# Altium PCB Shutdown_pcb.PcbDoc
Units mm, origin at the board's own origin, x right, y up, seen from the top; angles counter-clockwise.
Board outline 70 x 60.02 mm, 2 copper layers (Top Layer, Bottom Layer); 21 components, 20 nets, 84 pads, 0 vias.
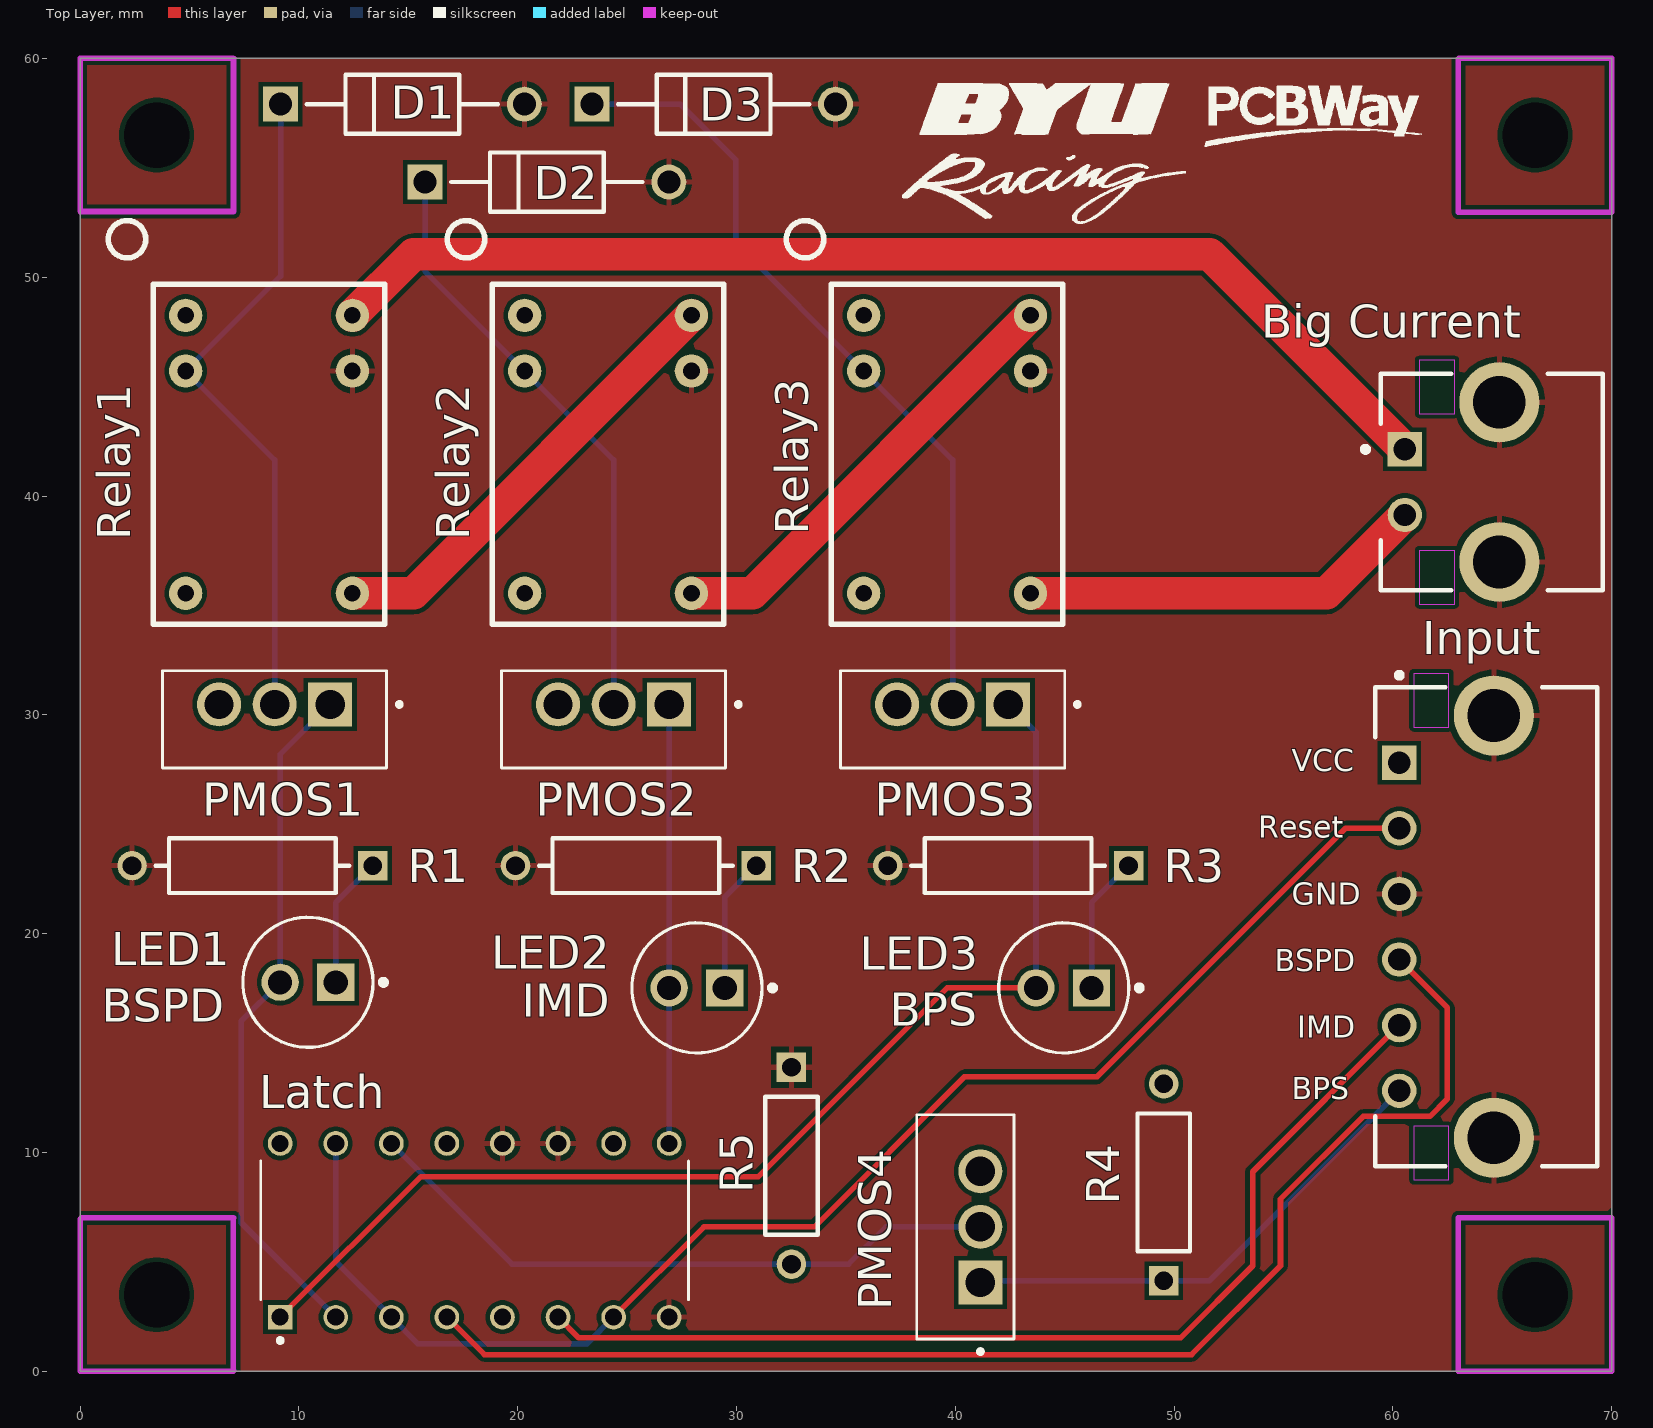
[diagram p0: Top Layer view]
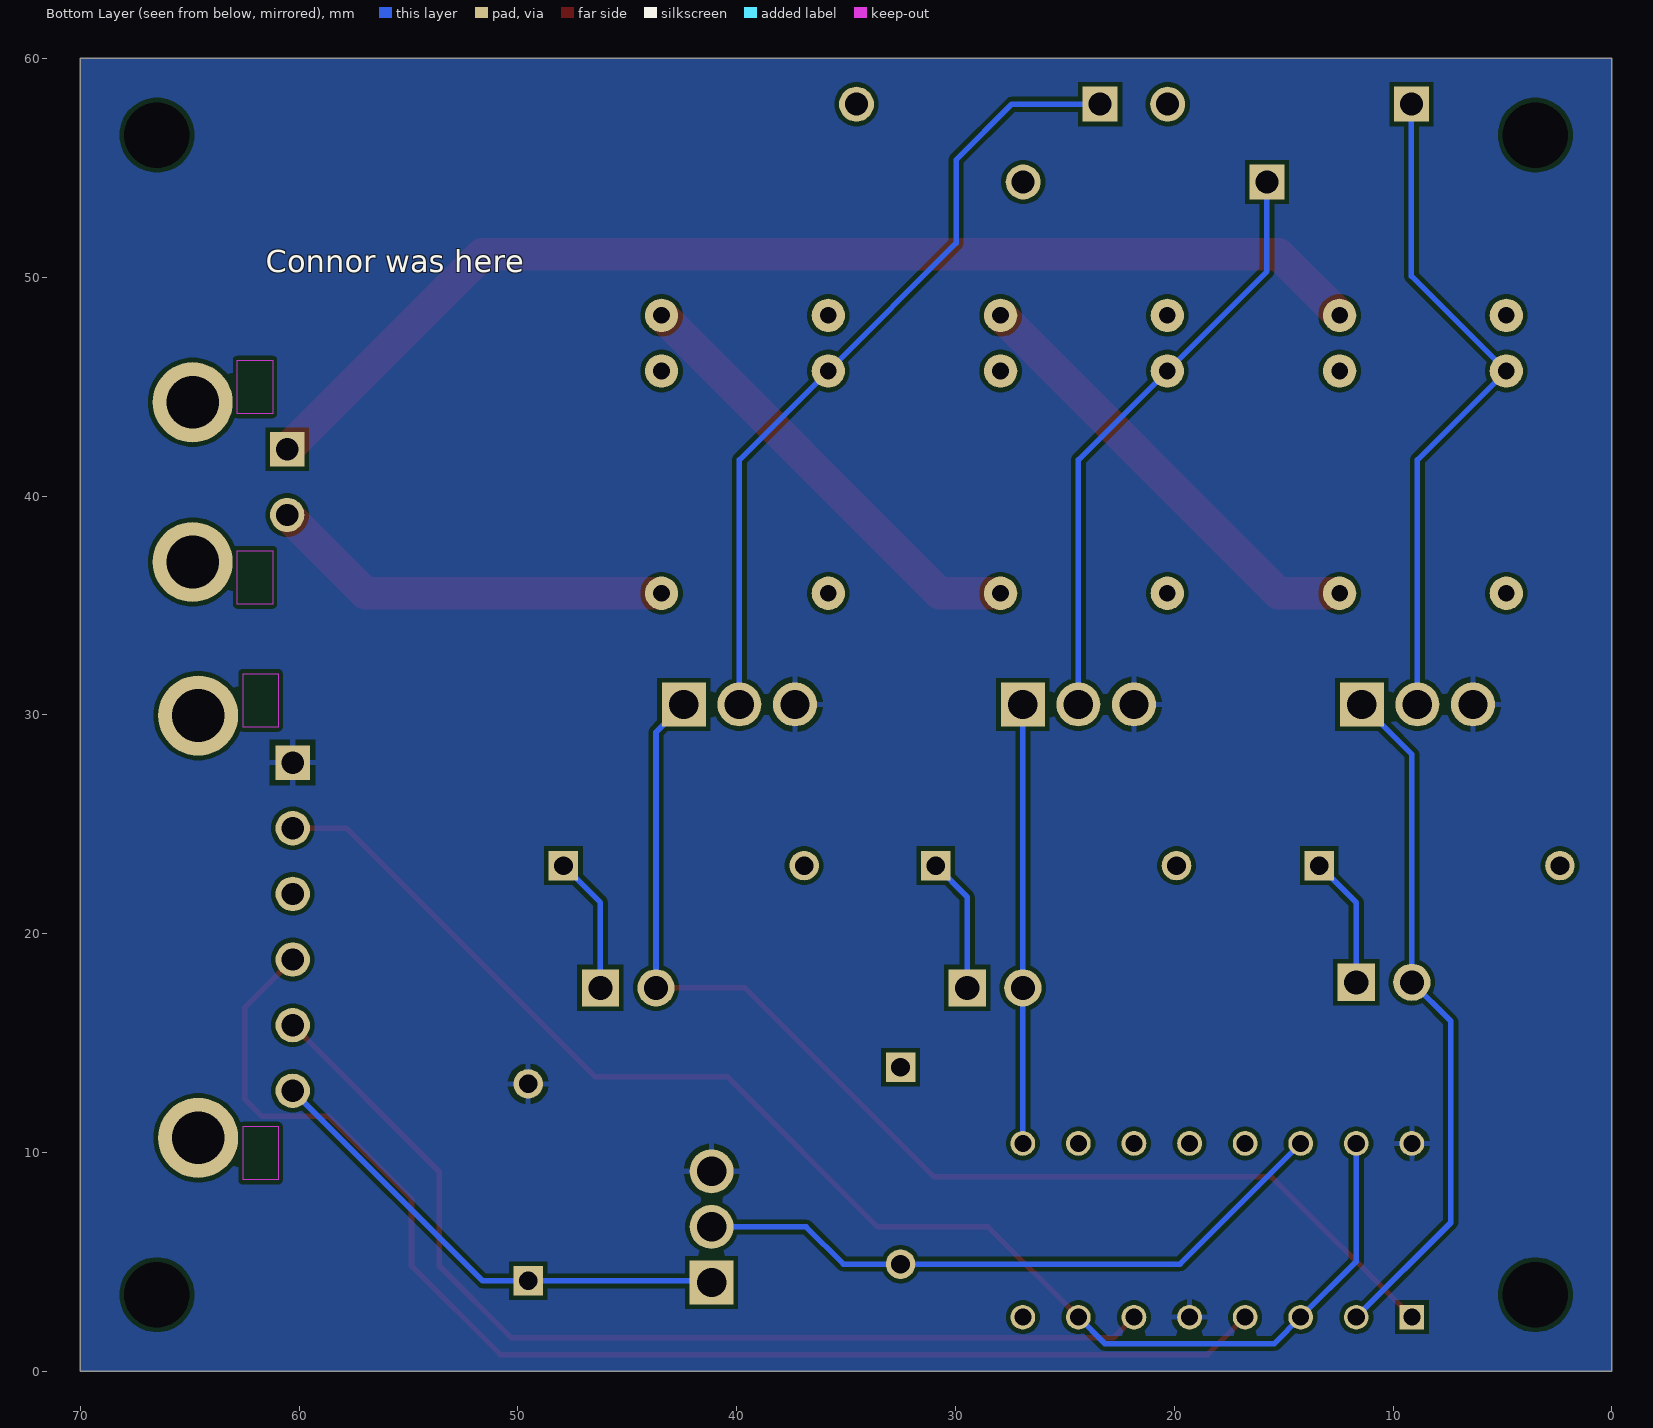
[diagram p1: Bottom Layer view, seen from below]
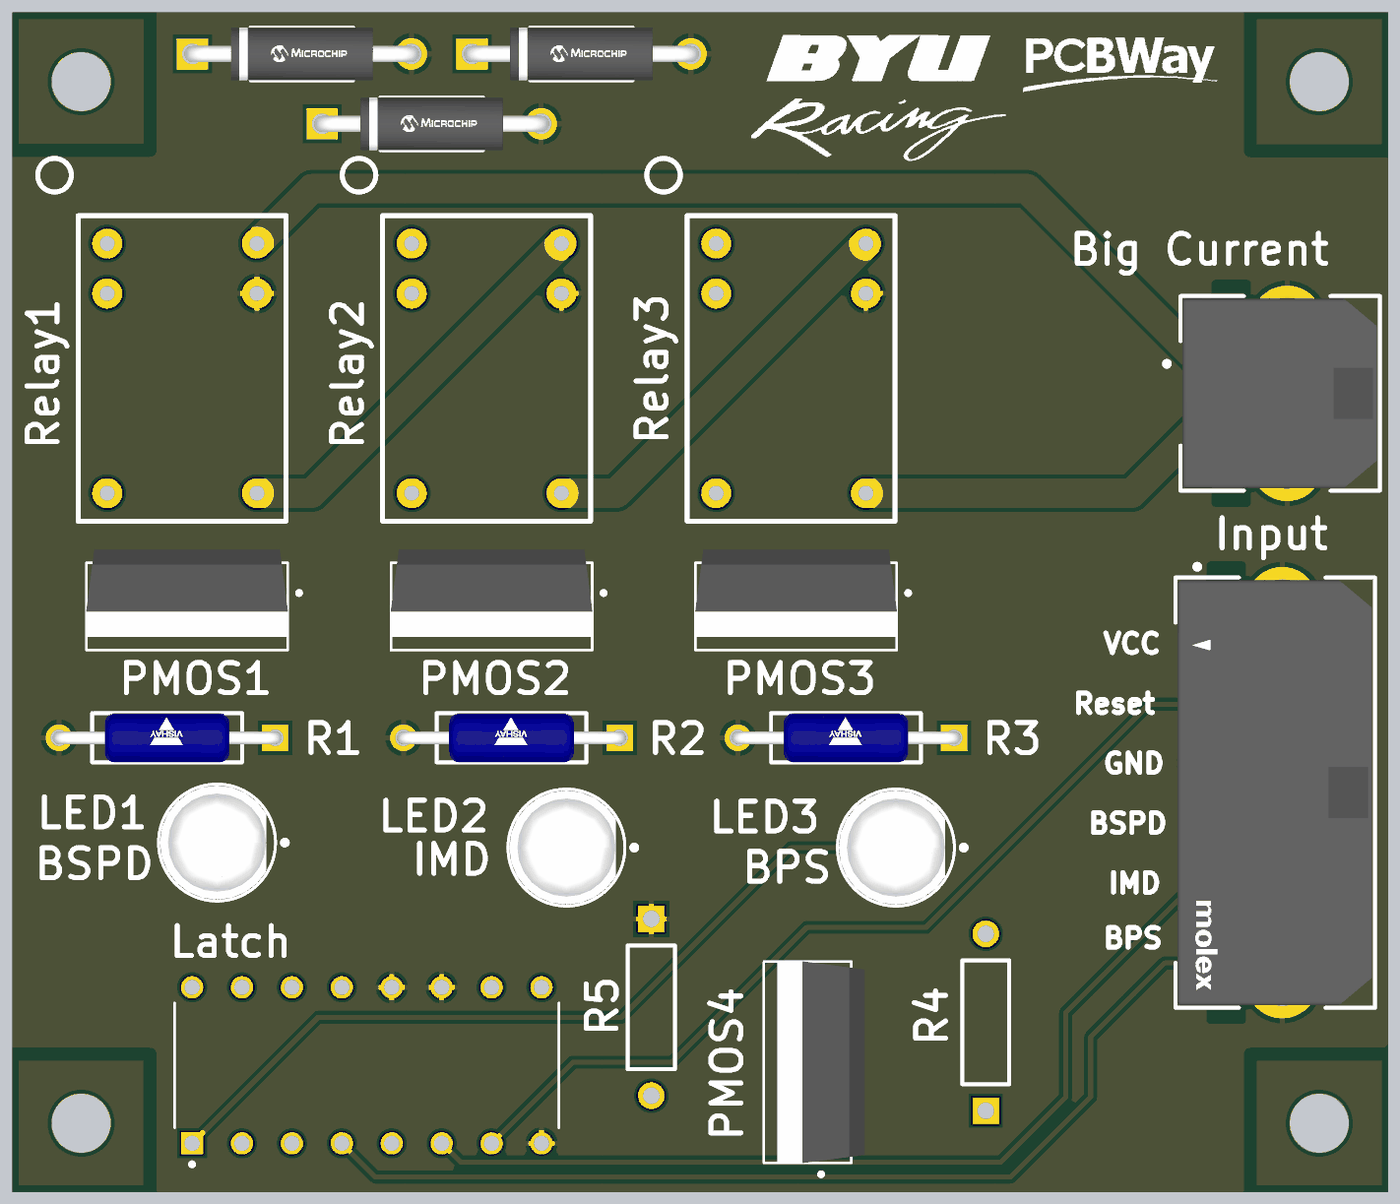
[diagram p2: 3D render of the assembled board from above, using the file's embedded part models]

## Layer stack, top to bottom
Top Solder: solder mask 0.0102, Solder Resist, Dk 3.5
Top Layer: signal copper 0.0356
Dielectric 1: dielectric 0.32, FR-4, Dk 4.8
Bottom Layer: signal copper 0.0356
Bottom Solder: solder mask 0.0102, Solder Resist, Dk 3.5

## Board outline
0,0 70.002,0 70.002,60.02 0,60.02

## Design rules (kind name [scope] priority, off if disabled: settings)
Clearance [All] p1: gap=0.2 ignorepadtopadclearanceinfootprint=FALSE
ComponentClearance [All] p1: gap=0.254 collisioncheckmode=3 verticalgap=0.2 showdistances=FALSE
HoleSize [All] p1: absolutevalues=TRUE maxlimit=5 minlimit=0.025 maxpercent=80.000 minpercent=20.000
HoleToHoleClearance [All] p1: gap=0.1 allowstackedmicrovias=TRUE
MinimumSolderMaskSliver [All] p1: minsoldermaskwidth=0.1
PolygonConnect [All] p1: connectstyle=Relief reliefconductorwidth=0.254 reliefentries=4 polygonreliefangle="90 Angle" airgapwidth=0.254
RoutingVias [All] p1: holewidth=0.711 width=1.27 viastyle="Through Hole" minholewidth=0.711 minwidth=1.27 maxholewidth=0.711 maxwidth=1.27
SilkToSilkClearance [All] p1: silktosilkclearance=0.15
SilkToSolderMaskClearance [IsPad] p1: minsilkscreentomaskgap=0.1 clearancetoexposedcopper=TRUE
SolderMaskExpansion [All] p1: expansion=0.102 istentingtop=FALSE
SupplyNets "Schematic Supply Nets_1" [InNet('GND')] p1: voltage=0.000
SupplyNets "Schematic Supply Nets" [InNet('VCC')] p2: voltage=0.000
Width [All] p1: maxlimit=2 minlimit=0.254 preferedwidth=0.254 minimp=50.000000 maximp=50.000000 favimp=50.000000
24 further rules are at their usual default settings.

## Components (designator, comment, footprint, x,y, rotation, side; value= is the part's Value field where it differs from the comment)
"Big Current" "43650-0205" FP-43650-0205-MFG 64.516,40.64 r90 top
D1 "1N4004-TP" FP-DO-41-MFG 14.732,57.912 r0 top
D2 "1N4004-TP" FP-DO-41-MFG 21.336,54.356 r0 top
D3 "1N4004-TP" FP-DO-41-MFG 28.956,57.912 r0 top
Input "43650-0603" FP-43650-0603-MFG 64.262,20.32 r90 top
Latch "CD4043BE" DIP794W45P254L1969H508Q16 18.034,6.444 r90 top
LED1 "TSFF5210" FP-6_544-5258_09-4-MFG 10.414,17.78 r180 top
LED2 "TSFF5210" FP-6_544-5258_09-4-MFG 28.194,17.526 r180 top
LED3 "TSFF5210" FP-6_544-5258_09-4-MFG 44.958,17.526 r180 top
PMOS1 "IRF9640PBF" TO254P1052X465X1989-3 8.89,30.48 r180 top
PMOS2 "IRF9640PBF" TO254P1052X465X1989-3 24.384,30.48 r180 top
PMOS3 "IRF9640PBF" TO254P1052X465X1989-3 39.878,30.48 r180 top
PMOS4 "IRF9640PBF" TO254P1052X465X1989-3 41.148,6.604 r90 top
R1 "RLR07C15R0FSB14" FP-RLR07-MFG 7.874,23.114 r180 top
R2 "RLR07C15R0FSB14" FP-RLR07-MFG 25.4,23.114 r180 top
R3 "RLR07C15R0FSB14" FP-RLR07-MFG 42.418,23.114 r180 top
R4 "MFR-25FBF5210K" RESA60-630X240 49.53,8.636 r90 top
R5 "MFR-25FBF5210K" RESA60-630X240 32.512,9.398 r270 top
Relay1 "J1021CS512VDC.45" J1021CS512VDC.45-Footprint-2 3.346,34.14 r0 top
Relay2 "J1021CS512VDC.45" J1021CS512VDC.45-Footprint-2 18.84,34.14 r0 top
Relay3 "J1021CS512VDC.45" J1021CS512VDC.45-Footprint-2 34.334,34.14 r0 top

## Footprints (in the part's own frame and the unit in brackets; to place one, negate y for a bottom-side part, rotate by r counter-clockwise, add the part's x,y. Pads: shape width x height; smd on the part's side, far side on the other; paste and mask are expansions set on the pad)
DIP794W45P254L1969H508Q16 [mm]
  rect 1.13x1.13 hole 0.78: 1(-3.97,8.89)
  round 1.13 hole 0.78: 2(-3.97,6.35) 3(-3.97,3.81) 4(-3.97,1.27) 5(-3.97,-1.27) 6(-3.97,-3.81) 7(-3.97,-6.35) 8(-3.97,-8.89) 9(3.97,-8.89) 10(3.97,-6.35) 11(3.97,-3.81) 12(3.97,-1.27) 13(3.97,1.27) 14(3.97,3.81) 15(3.97,6.35) 16(3.97,8.89)
  silkscreen extent -5.13,-9.77 3.18,9.77
FP-6_544-5258_09-4-MFG [mm]
  rect 1.7x1.7 hole 1.1 paste-2539.97 mask+0: 1(-1.27,0)
  round 1.7 hole 1.1 paste-2539.97 mask+0: 2(1.27,0)
  silkscreen extent -3.58,-2.97 2.97,2.97, body extent -3.08,-3.08 3.08,3.08, height 0.25
FP-43650-0205-MFG [mm]
  rect 1.57x1.57 hole 1.02 paste-2539.97 mask+0: 1(1.5,3.97)
  round 1.57 hole 1.02 paste-2539.97 mask+0: 2(-1.5,3.97)
  round 3.66 hole 2.41 paste-2539.97 mask+0: 3(-3.65,-0.35) 4(3.65,-0.35)
  Keep-Out Layer region: -5.575,1.7 -3.125,1.7 -3.125,3.3 -5.575,3.3
  Keep-Out Layer region: 3.125,1.7 5.575,1.7 5.575,3.3 3.125,3.3
  silkscreen extent -4.95,-5.07 4.95,5.89, body extent -5.58,-5.18 5.58,5.18, height 0.25
FP-43650-0603-MFG [mm]
  rect 1.57x1.57 hole 1.02 paste-2539.97 mask+0: 1(7.5,3.97)
  round 1.57 hole 1.02 paste-2539.97 mask+0: 2(4.5,3.97) 3(1.5,3.97) 4(-1.5,3.97) 5(-4.5,3.97) 6(-7.5,3.97)
  round 3.66 hole 2.41 paste-2539.97 mask+0: 7(-9.65,-0.35) 8(9.65,-0.35)
  Keep-Out Layer region: 9.12,1.7 11.57,1.7 11.57,3.3 9.12,3.3
  Keep-Out Layer region: -11.57,1.7 -9.12,1.7 -9.12,3.3 -11.57,3.3
  silkscreen extent -10.94,-5.07 11.62,5.07, body extent -11.58,-5.18 11.58,5.18, height 0.25
FP-DO-41-MFG [mm]
  rect 1.6x1.6 hole 1.05 paste-2539.97 mask+0: 1(-5.57,0)
  round 1.6 hole 1.05 paste-2539.97 mask+0: 2(5.57,0)
  silkscreen extent -4.37,-1.35 4.37,1.35, body extent -6.47,-1.45 6.47,1.45, height 0.25
FP-RLR07-MFG [mm]
  rect 1.35x1.35 hole 0.85 paste-2539.97 mask+0: 1(-5.5,0)
  round 1.35 hole 0.85 paste-2539.97 mask+0: 2(5.5,0)
  silkscreen extent -4.42,-1.25 4.42,1.25, body extent -6.27,-1.35 6.27,1.35, height 0.25
J1021CS512VDC.45-Footprint-2 [mil]
  round 60 hole 30: 1(58.27,555.91) 2(58.27,455.91) 3(58.27,55.91) 4(358.27,55.91) 5(358.27,455.91) 6(358.27,555.91)
  silkscreen extent -81,0 417,727
RESA60-630X240 [mm] "Axial Resistor, 2-Leads, Dia 2.4mm, Body Length 6.3mm"
  rect 1.35x1.35 hole 0.85: 1(-4.5,0)
  round 1.35 hole 0.85: 2(4.5,0)
  silkscreen extent -3.15,-1.2 3.15,1.2, body extent -3.15,-1.2 3.15,1.2, height 2.4
TO254P1052X465X1989-3 [mm]
  rect 2.01x2.01 hole 1.34: 1(-2.54,0)
  round 2.01 hole 1.34: 2(0,0) 3(2.54,0)
  silkscreen extent -5.8,-1.54 5.12,2.91, body extent -5.14,-2.22 5.14,2.23, height 19.06

## Part data
"Big Current": library part CMP-00257-07672643-1, "43650-0205 Conn Wire to Board HDR 2 POS 3mm Solder RA Side Entry Thru-Hole Micro-Fit 3.0™ Tray", Current Rating=5A, Manufacturer Lifecycle Status=ACTIVE, Voltage Rating=600V, Contact Material=Brass, Contact Plating=Gold, Country of Origin=US, Gender=Male, Glow Wire Compliant=Compliant, Halogen Free="Low Halogen", Housing Material=Thermoplastic, Lifecycle Status=Production, NexarPartId=7672643, Number of Circuits=2, Number of Contacts=2, Number of Positions=2, Number of Rows=1, Orientation="Right Angle", Pitch=3mm, Plating=Tin, RoHS=Compliant, Termination="Through Hole"
D1 D2 D3: library part CMP-56207-000012-1, "DIODE GEN PURP 400V 1A DO41", Average Rectified Current=1A, Capacitance=15pF, Case/Package=DO-41, Forward Voltage=1V, Max Forward Surge Current (Ifsm)=30A, Max Operating Temperature=150°C, Max Repetitive Reverse Voltage (Vrrm)=400V, Max Reverse Current=5uA, Min Operating Temperature=-55°C, Package Quantity=1, Current Rating=1A, Diameter=2.7mm, Element Configuration=Single, Forward Current=1A, Lead Free="Lead Free", Length=5.2mm, Max Reverse Voltage (DC)=400V, Max Surge Current=30A, Mount="Through Hole", Number of Pins=2, Output Current=1A, Packaging="Tape and Reel", Peak Non-Repetitive Surge Current=30A, Polarity=Standard, Radiation Hardening=No, Recovery Time=2000ns, Reverse Recovery Time=2us, Reverse Voltage=400V, RoHS Compliant=Yes, Voltage Rating (DC)=400V
Input: library part CMP-00257-00298086-1, "43650-0603 Conn Power HDR 6 POS 3mm Solder RA Thru-Hole 6 Terminal 1 Port Micro-Fit 3.0™ Frame", Color=Black, Current Rating=5A, Flammability Rating="UL94 V-0", Manufacturer Lifecycle Status=ACTIVE, Max Operating Temperature=105°C, Min Operating Temperature=-40°C, Voltage Rating=600V, Voltage Rating (DC)=250V, Connector Type="Male Pin", Contact Gender=Male, Contact Material=Brass, Contact Plating=Tin, Country of Origin=US, Fastening Type=Ramp, Gender=Male, Glow Wire Compliant=Compliant, Halogen Free="Low Halogen", Housing Color=Black, Housing Material=Thermoplastic, Lead Pitch=3mm, Lifecycle Status=Production, Mount="Through Hole", NexarPartId=298086, Number of Circuits=6, Number of Contacts=6, Number of Positions=6, Number of Rows=1, Orientation="Right Angle", Pitch=3mm, Plating=Tin, RoHS=Compliant, Termination=Solder
Latch: "CMOS Quad NOR R/S Latch with 3-State Outputs 16-PDIP -55 to 125", Package="PDIP-16 Texas Instruments", Arrow_Electronics-Purchase-URL=https://snapeda.com/shop?store=Arrow+Electronics&id=577167, Availability=Good, BuyPart=https://www.snapeda.com/parts/CD4043BE/Texas%20Instruments/view-part/577167/?ref=eda, DigiKey-Purchase-URL=https://snapeda.com/shop?store=DigiKey&id=577167, MF="Texas Instruments", Mouser-Purchase-URL=https://snapeda.com/shop?store=Mouser&id=577167, MP=CD4043BE, Price=None, SnapEDA_Link=https://www.snapeda.com/parts/CD4043BE/Texas%20Instruments/view-part/577167/?ref=snap, Texas_Instruments-Purchase-URL=https://snapeda.com/shop?store=Texas+Instruments&id=577167
LED1 LED2 LED3: library part CMP-00030-41223146-1, "TSFF5210 TSFF5210 IR LED, 870nm, T-1 3/4 (5mm) Through Hole package", Case/Package=Radial, Forward Current=100mA, Forward Voltage=1.5V, Max Operating Temperature=85°C, Min Operating Temperature=-40°C, Power Dissipation=180W, Power Rating=250mW, Reverse Voltage=5V, Contact Plating=Tin, Depth=5.8mm, Lead Free="Lead Free", Length=5.8mm, Lens Style="Circular, Colorless, Diffused, Round", Mount="Through Hole", NexarPartId=41223146, Number of Elements=1, Number of LEDs=1, Number of Pins=2, Orientation="Top View", Packaging=Bulk, Peak Wavelength=870nm, Radiation Hardening=No, REACH SVHC=Unknown, Rise Time=15ns, RoHS=Compliant, Schedule B="8541402000, 8541402000", Test Current=100mA, Viewing Angle=20°, Wavelength=870nm
PMOS1 PMOS2 PMOS3 PMOS4: "P-Channel 200V 11A (Tc) 125W (Tc) Through Hole TO-220AB", Package="TO-220 Vishay", Availability=Good, Check_prices=https://www.snapeda.com/parts/IRF9640PBF/Vishay%20Siliconix/view-part/238294/?ref=eda, MF="Vishay Siliconix", MP=IRF9640PBF, Price=None, Purchase-URL=https://pricing.snapeda.com/search/part/IRF9640PBF/?ref=eda, SnapEDA_Link=https://www.snapeda.com/parts/IRF9640PBF/Vishay%20Siliconix/view-part/238294/?ref=snap
R1 R2 R3: library part CMP-00030-42769933-1, "RLR07C15R0FSB14 Res Metal Film 15 Ohm 1% 1/4W ±100ppm/°C 0.001% Conformal AXL Thru-Hole Bulk", Case/Package=Conformal, Max Operating Temperature=150°C, Max Power Dissipation=250mW, Min Operating Temperature=-65°C, Resistance=15Ω, Temperature Coefficient=100ppm/°C, Tolerance=1%, Composition="Metal Film", Contact Plating="Lead, Tin", Diameter=2.29mm, Failure Rate=0.001%, Features="Military, Moisture Resistant, Weldable", Lead Free="Contains Lead", Length=7.62mm, Military Standard=MIL-PRF-39017, Mount="Through Hole", NexarPartId=42769933, Number of Terminations=2, Packaging=Bulk, Power Rating=250mW, RoHS=Compliant, Schedule B=8533210090, Termination=Axial, Width=2.29mm
R4 R5: library part CMP-1659-00074-2, "Axial Resistor, 10 KOhm, +/- 1%, 0.25 W, -55 to 155 degC, 2-Pin THD, RoHS, Bulk", Case\/Package=Axial, Manufacturer=Yageo, Max Operating Temperature=155degC, Max Power Dissipation=250mW, Min Operating Temperature=-55degC, Package Description="2-Pin Axial Lead, Dia 2.4 mm, Body Length 6.3 mm", Package Quantity=200, Package Reference=MFR-25, Resistance=10KOhm, Temperature Coefficient=100ppm\/degreesC, Tolerance=1%, Voltage Rating=250V, Voltage Rating (DC)=200V, Composition=MetalFilm, Datasheet URL=http://www.yageo.com/documents/recent/Yageo%20LR_MFR_2013.pdf, Datasheet Version=04/2013, Lead Free=LeadFree, Length=0.248inch, Manufacturer URL=http://www.yageo.com/, Military Standard=Not, Mount=ThroughHole, Mounting Technology=ThroughHole, Number of Terminations=2, Packaging=Bulk, Power Rating=250mW, RoHSCompliant=True, Termination=Axial
Relay1 Relay2 Relay3: library part CMP-008-00005-1, Current Rating=5A, Mounting Technology=TH, Pins=6

## Free pads (board coordinates)
  round 0 hole 3: 3(3.5,56.5) 4(66.5,56.5) 5(66.5,3.5) 6(3.5,3.5)

## Nets (pads, with @x,y where several pads share a name; then routed paths per layer and width w, separated by ;. In a path a pad name is that pad's centre, name@x,y a point inside that pad or via, vN(x,y) a via of type N, cw(c..) or ccw(c..) an arc to the next point about the centre after c; other vN are vias at no path point)
GND: "Big Current.3" "Big Current.4" D1.2 D2.2 D3.2 Input.3 Input.7 Input.8 Latch.8 Latch.11 Latch.12 R1.2 R2.2 R3.2 R5.1 Relay1.5 Relay2.5 Relay3.5
"NetBig Current_1": "Big Current.1" Relay1.6 | length 52.9
  Top Layer w1.5: Relay1.6 15.24,51.054 51.632,51.054 60.546,42.14
"NetBig Current_2": "Big Current.2" Relay3.4 | length 18.6
  Top Layer w1.5: Relay3.4 56.966,35.56 60.546,39.14
NetD1_1: D1.1 PMOS1.2 Relay1.2 | length 30.9
  Bottom Layer w0.254: PMOS1.2 8.89,41.656 Relay1.2 9.162,50.056 D1.1
NetD2_1: D2.1 PMOS2.2 Relay2.2 | length 27.4
  Bottom Layer w0.254: D2.1 15.766,50.274 Relay2.2 24.384,41.656 PMOS2.2
NetD3_1: D3.1 PMOS3.2 Relay3.2 | length 36.6
  Bottom Layer w0.254: D3.1 27.432,57.912 29.972,55.372 29.972,51.562 Relay3.2 39.878,41.656 PMOS3.2
NetInput_2: Input.2 Latch.3 Latch.7 Latch.15 | length 65.3
  Top Layer w0.254: Latch.7 28.514,6.604 33.56,6.604 40.418,13.462 46.482,13.462 57.84,24.82 Input.2
  Bottom Layer w0.254: Latch.15 11.684,5.014 Latch.3 15.428,1.27 23.18,1.27 Latch.7
NetInput_4: Input.4 Latch.4 | length 60.3
  Top Layer w0.254: Latch.4 18.476,0.762 50.8,0.762 54.864,4.826 54.864,7.874 58.644,11.654 61.692,11.654 62.484,12.446 62.484,16.628 Input.4
NetInput_5: Input.5 Latch.6 | length 47.3
  Top Layer w0.254: Latch.6 22.79,1.528 50.296,1.528 53.594,4.826 53.594,9.122 Input.5
NetInput_6: Input.6 PMOS4.1 R4.1 | length 22.8
  Bottom Layer w0.254: PMOS4.1 41.22,4.136 R4.1 51.608,4.136 Input.6
NetLatch_1: Latch.1 LED3.2 PMOS3.1 | length 54.3
  Top Layer w0.254: Latch.1 15.56,8.89 30.988,8.89 39.624,17.526 LED3.2
  Bottom Layer w0.254: PMOS3.1 43.688,29.21 LED3.2
NetLatch_2: Latch.2 LED1.2 PMOS1.1 | length 31.5
  Bottom Layer w0.254: PMOS1.1 9.144,28.194 LED1.2 7.366,16.002 7.366,6.792 Latch.2
NetLatch_9: Latch.9 LED2.2 PMOS2.1 | length 20.1
  Bottom Layer w0.254: Latch.9 LED2.2 PMOS2.1
NetLatch_14: Latch.14 PMOS4.2 R5.2 | length 29.9
  Bottom Layer w0.254: Latch.14 19.74,4.898 R5.2 35.124,4.898 36.83,6.604 PMOS4.2
NetLED1_1: LED1.1 R1.1 | length 6
  Bottom Layer w0.254: LED1.1 11.684,21.424 R1.1
NetLED2_1: LED2.1 R2.1 | length 6.2
  Bottom Layer w0.254: LED2.1 29.464,21.678 R2.1
NetLED3_1: LED3.1 R3.1 | length 6.3
  Bottom Layer w0.254: LED3.1 46.228,21.424 R3.1
NetRelay1_4: Relay1.4 Relay2.6 | length 20.8
  Top Layer w1.5: Relay1.4 15.24,35.56 Relay2.6
NetRelay2_4: Relay2.4 Relay3.6 | length 20.8
  Top Layer w1.5: Relay2.4 30.734,35.56 Relay3.6
VCC: Input.1 Latch.5 Latch.16 PMOS1.3 PMOS2.3 PMOS3.3 PMOS4.3 R4.2
pads on no net: Latch.10 Latch.13 Relay1.1 Relay1.3 Relay2.1 Relay2.3 Relay3.1 Relay3.3

## Polygon pours and split planes (outlines as drawn)
GND on Top Layer "GND_L01_P005" (solid, pour order 5): 70.002,0 0,0 0,60.02 70.02,60.02 70,59.995
VCC on Bottom Layer "VCC_L02_P006" (solid, pour order 6): 0,0 70.002,0 70.002,60.02 0,60.02

## Keep-outs
Top Layer:
  lines w0.254: 7,0 7,7 ; 7.01,0.025 6.985,0 0,0 0,6.96 0.051,7.01 7.01,7.01 ; 70,59.995 70,52.987 69.998,52.984 62.992,52.984 62.992,59.994 63.005,60.008 70.01,60.008 ; 0,53.01 0,60.02 7.01,60.02 7.01,53.01 0,53.01 ; 62.992,0.016 63.008,0 70.002,0 70.002,7.01 62.992,7.01 62.992,0.016

## Silkscreen, mask and mechanical layers (free items; w line width, h text height)
Top Overlay:
  drawing of 10 lines, arcs and shapes, not listed
  text "VCC" at 55.372,27.432 h1
  text "Reset" at 53.848,24.384 h1
  text "GND" at 55.372,21.336 h1
  text "BSPD" at 54.61,18.288 h1
  text "IMD" at 20.193,16.205 h1.52
  text "BSPD" at 0.991,15.977 h1.52
  text "BPS" at 36.994,15.799 h1.52
  text "IMD" at 55.626,15.24 h1
  text "BPS" at 55.372,12.446 h1
Bottom Overlay:
  text "Connor was here" at 61.519,50.241 h1.02